# Altium PCB VoltageRegulator.PcbDoc
Units mil, origin at the board's own origin, x right, y up, seen from the top; angles counter-clockwise.
Board outline 2250 x 1100 mil, 2 copper layers (Top Layer, Bottom Layer); 9 components, 6 nets, 30 pads, 1 vias.
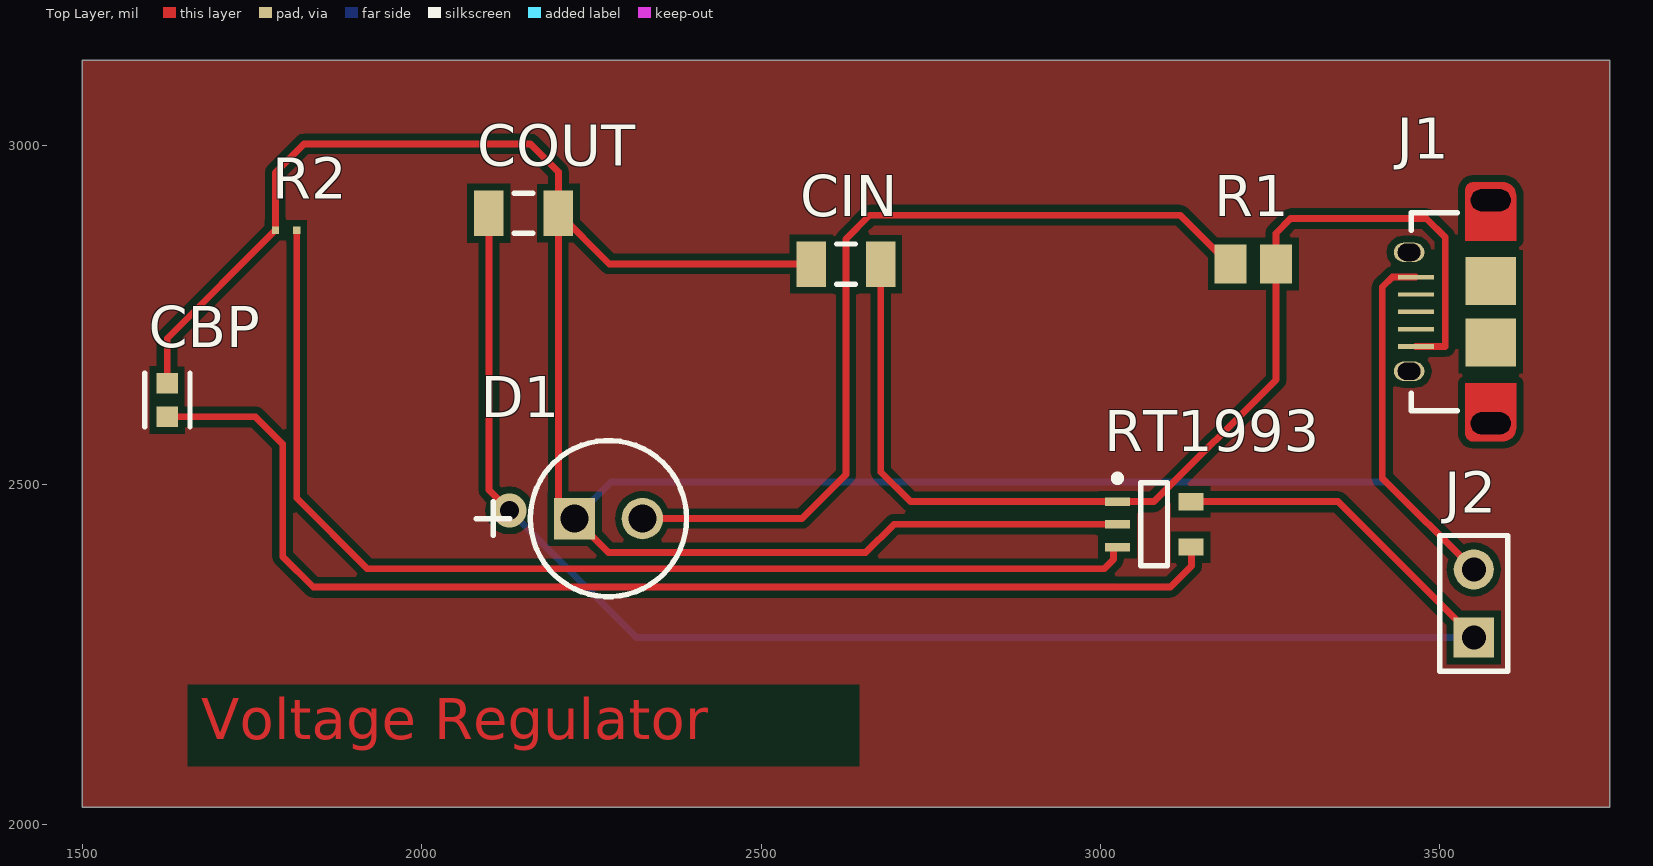
[diagram p0: Top Layer view]
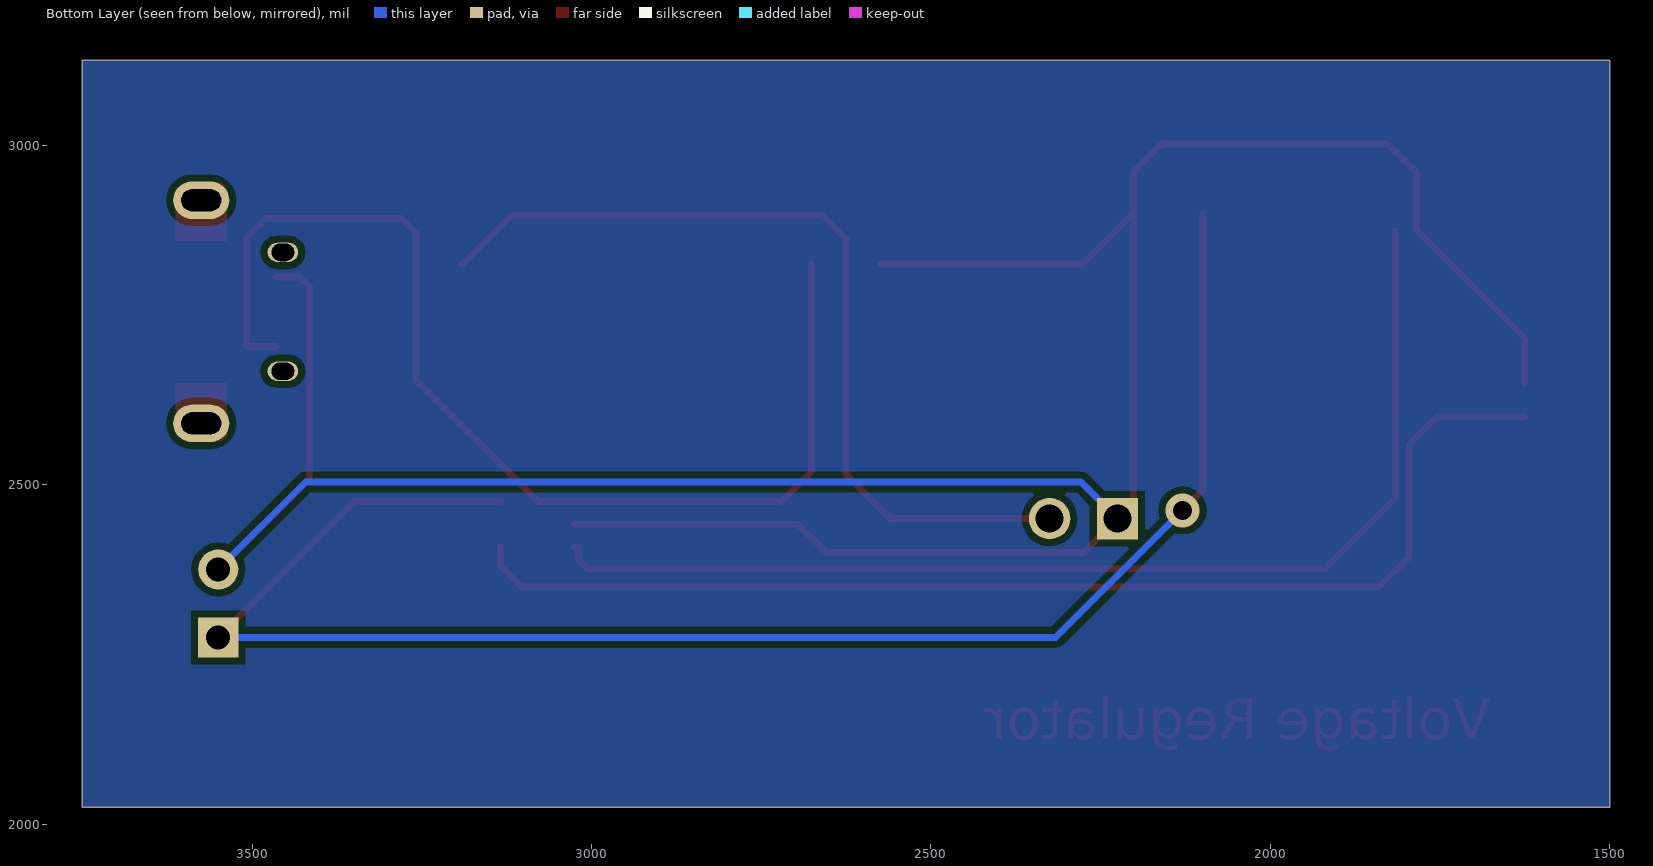
[diagram p1: Bottom Layer view, seen from below]

## Layer stack, top to bottom
Top Solder: solder mask 0.4, Solder Resist, Dk 3.5
Top Layer: signal copper 1.4
Dielectric 1: dielectric 12.6, FR-4, Dk 4.8
Bottom Layer: signal copper 1.4
Bottom Solder: solder mask 0.4, Solder Resist, Dk 3.5

## Board outline
1500,2025 3750,2025 3750,3125 1500,3125

## Design rules (kind name [scope] priority, off if disabled: settings)
Clearance [All] p1: gap=10 ignorepadtopadclearanceinfootprint=FALSE except(0: Arc-Hole Track-Hole SMDPad-Hole THPad-Hole Via-Hole Fill-Hole Poly-Hole Region-Hole Text-Hole)
PolygonConnect [All] p1: connectstyle=Relief reliefconductorwidth=10 reliefentries=4 polygonreliefangle="90 Angle" airgapwidth=10
RoutingVias [All] p1: holewidth=28 width=50 viastyle="Through Hole" minholewidth=28 minwidth=50 maxholewidth=28 maxwidth=50
SolderMaskExpansion [All] p1: expansion=4
Width [All] p1: maxlimit=10 minlimit=10 preferedwidth=10
30 further rules are at their usual default settings.

## Components (designator, comment, footprint, x,y, rotation, side; value= is the part's Value field where it differs from the comment)
CBP "CL10B223KB8NNNC" FP-CL10-IPC_C 1625,2624.68 r90 top
CIN "C1206C105K5RACTU" CAPC3216X110X50LL20T25 2625,2825 r0 top
COUT "C1206C105K5RACTU" CAPC3216X110X50LL20T25 2150,2900 r180 top
D1 "HLMP-3301" AVAG-HLMP-3301-2 2225,2450 r0 top
J1 "629105150921" 629105150921 3575,2754.72 r90 top
J2 "Header 2" HDR1X2 3550,2275 r90 top
R1 "ERA6AEB221V" RESC2013X60X40NL20T25 3225,2825 r0 top
R2 "CRCW0402100KJNED" RESC1005X40X25LL05T05 1800,2875 r0 top
RT1993 "3.3V" SOT85P279X130-5N 2944.13,2346.54 r0 top

## Footprints (in the part's own frame and the unit in brackets; to place one, negate y for a bottom-side part, rotate by r counter-clockwise, add the part's x,y. Pads: shape width x height; smd on the part's side, far side on the other; paste and mask are expansions set on the pad)
629105150921 [mm] "Micro USB 2.0 Type AB Horizontal"
  rect 0.171x1.35 smd: 1(-1.3,2.805) 2(-0.65,2.805) 3(0,2.805) 5(1.3,2.805)
  rect 0.146x1.35 smd: 4(0.65,2.805)
  round 0 / inner oval 1.4x2.1 / far side oval 1.4x2.1 hole 0.825 slot 1.5 at 90 deg: Shell(-4.175,0)
  oval 0.72x1.148 hole 0.65 slot 0.85 at 90 deg: Shell(-2.225,3.055) Shell(2.225,3.055)
  rect 1.8x1.9 smd: Shell(-1.15,0) Shell(1.15,0)
  round 0 / inner round 0 / far side oval 1.4x2.1 hole 0.825 slot 1.5 at 90 deg: Shell(4.175,0)
  Top Layer region: 4.353,-0.95 4.544,-0.912 4.706,-0.804 4.814,-0.641 4.852,-0.45 4.852,-0.45 4.852,0.65 4.83,0.765 4.765,0.862 4.667,0.927 4.553,0.95 4.553,0.95 2.668,0.95 2.668,-0.95
  Top Layer region: -4.353,-0.95 -4.544,-0.912 -4.706,-0.804 -4.814,-0.641 -4.852,-0.45 -4.852,-0.45 -4.852,0.65 -4.83,0.765 -4.765,0.862 -4.667,0.927 -4.553,0.95 -4.553,0.95 -2.668,0.95 -2.668,-0.95
  silkscreen extent -3.7,1.25 3.7,2.97, body extent -4.3,-2.64 4.3,3.23, height 2.76
AVAG-HLMP-3301-2 [mm] "THD, 2-Leads, Body Dia 5.85mm"
  rect 1.55x1.55 hole 1.05: 1(0,0)
  round 1.55 hole 1.05: 2(2.54,0)
  silkscreen extent -3.68,-2.92 4.19,2.92
CAPC3216X110X50LL20T25 [mm] "Chip Capacitor, 2-Leads, Body 3.20x1.60mm, IPC High Density"
  rect 1.1x1.7 smd: 1(-1.3,0) 2(1.3,0)
  silkscreen extent -0.35,-0.75 0.35,0.75, body extent -1.7,-0.9 1.7,0.9, height 1.1
FP-CL10-IPC_C [mil]
  rect 29.85x31.97 smd paste+0 mask+0: 1(-24.68,0) 2(24.69,0)
  silkscreen extent -40,-33 40,33, body extent -44,-22 44,22, height 10
HDR1X2 [mm] "Connector; Header; 2 Position"
  rect 1.5x1.5 hole 0.9: 1(0,0)
  round 1.5 hole 0.9: 2(2.54,0)
  silkscreen extent -1.27,-1.27 3.81,1.27
RESC1005X40X25LL05T05 [mm] "Chip Resistor, 2-Leads, Body 1.00x0.50mm, IPC High Density"
  rect 0.272x0.272 smd: 1(-0.4,0) 2(0.4,0)
  body extent -0.53,-0.27 0.53,0.28, height 0.4
RESC2013X60X40NL20T25 [mm] "Chip Resistor, 2-Leads, Body 2.00x1.25mm, IPC Medium Density"
  rect 1.2x1.45 smd: 1(-0.85,0) 2(0.85,0)
  body extent -1.1,-0.72 1.1,0.72, height 0.6
SOT85P279X130-5N [mm] "SOT23, 5-Leads, Body 2.90x2.79mm, Pitch 0.85mm, IPC Medium Density"
  rect 0.95x0.32 smd: 1(2.054,3.263) 2(2.054,2.413) 3(2.054,1.563)
  rect 0.95x0.65 smd: 4(4.804,1.563) 5(4.804,3.263)
  silkscreen extent 1.93,0.86 3.93,4.26, body extent 1.93,0.86 4.93,3.96, height 1.3

## Part data
CBP: library part CMP-13271-001437-1, "Cap Ceramic 22nF 50V X7R ±10% Pad SMD 0603 +125°C T/R", Capacitance=22nF, Case/Package=0603, Case Code (Metric)=1608, Dielectric=X7R, Max Operating Temperature=125°C, Min Operating Temperature=-55°C, Package Quantity=1, Tolerance=10%, Voltage=50V, Case Code (Imperial)=0603, Contact Plating=Tin, Depth=0.8mm, Height=0.8mm, Lead Free="Lead Free", Length=1.6mm, Material=Ceramic, Mount="Surface Mount", Packaging="Tape and Reel", Radiation Hardening=No, Thickness=0.035inch, Voltage Rating=50V, Voltage Rating (DC)=50V, Width=0.031inch
CIN COUT: library part CMP-2000-06011-1, "Chip Capacitor, 1 uF, +/- 10%, 50 V, -55 to 125 degC, 1206 (3216 Metric), RoHS, Tape and Reel", Capacitance=1uF, Capacitance - nF=1000nF, Case Code - in=1206, Case Code - mm=3216, Case Height=1mm, Case Length=3.2mm, Case Width=1.6mm, Dielectric=X7R, Manufacturer=Kemet, Maximum Operating Temperature=+125C, Minimum Operating Temperature=-55C, Operating Temperature Range=-55Cto+125C, Package / Case=1206(3216metric), Package Description="2-Pin Surface Mount Device, Body 3.2 x 1.6 mm", Temperature Coefficient / Code=+/-15%, Tolerance=10%, Voltage Rating=50V, =C1206C105K5RAC7800, Brand=Kemet, Class=Class1, Datasheet URL=http://www.kemet.com/docfinder?Partnumber=C1206C105K5RACTU, Datasheet Version=02/2016, Dimensions=1.6mmWx3.2mmLx1mmH, Factory Pack Quantity=2500, Manufacturer URL=http://www.kemet.com/, Mounting Technology=SurfaceMount, Package Reference=1206, Packaging=Reel, Product=GeneralTypeMLCCs, Product Category=MultilayerCeramicCapacitorsMLCC-SMD/SMT, RoHS=Details, Series=C1206C, Termination Style=SMD/SMT, Type=SMDMLCCX7R6.3-250VDCCommericalGrade, Voltage Rating DC=50V
D1: library part CMP-2000-06411-1, "T-1 3/4 (5 mm) Diffused LED Lamp, 1.9 V, -40 to 100 degC, 2-Pin THD, RoHS, Bulk", Emitting Color=Red, Forward Current=25mA, Forward Voltage=2.4V, Manufacturer=Avago, Operating Temperature Classification=Industrial, Operating Temp Range=-40Cto100C, Package Description="2-Pin Through Hole LED, Dia 5.85 mm", Package Type=T-13/4, Power Dissipation=85W, Reverse Voltage=5V, Test Current (It)=10mA, Chip Material=GaP, Datasheet URL=http://www.avagotech.com/docs/AV02-1558EN, Datasheet Version=03/2015, DELETED=Compliant, Dominant Wave Length=626nm, High Brightness=No, Lens Dimensions=5.08x5.08x8.3mm, Lens Type=ColoredDiffused, Luminous Intensity=5.4mcd, Lum Intensity=5.4mcd, Main Category=StandardLED, Manufacturer URL=http://www.avagotech.com/, Mounting=ThroughHole, Mounting Technology=ThroughHole, Number of  Elements=1, Package Reference=HLMP-3301, Packaging=TapeandReel, Peak Wavelength=635nm, Pin Count=2, Product Depth (mm)=6.1mm, Product Height (mm)=9.19mm, Product Length (mm)=6.1mm, Rad Hardened=No, Shape Type=Circular, Type=Uni-Color, Viewing Angle=60deg
J1: library part CMP-1502-03249-1, "Micro USB 2.0 Type AB Receptacle WR-COM, Horizontal, SMT", Contact Resistance=30mOhm, Manufacturer="Wurth Elektronik", Operating temperature=-40to85degC, Rated Current=1.8A, Working Voltage=30VAC, Connector Type=MicroUSB2.0TypeAB, Datasheet URL=https://katalog.we-online.de/em/datasheet/629105150921.pdf, Gender=Receptacle, Manufacturer URL=http://www.we-online.de, Mounting Technology=SMT, Orientation=Horizontal, Package Reference=629105150921, Packaging=TapeandReel, Part Number=629105150921, Publisher=WurthElektronik
J2: "Header, 2-Pin", LatestRevisionDate=17-Jul-2002, LatestRevisionNote="Re-released for DXP Platform.", Publisher="Altium Limited"
R1: library part CMP-2001-00612-1, Manufacturer=Panasonic, Part Number=ERA6AEB221V
R2: library part CMP-2002-08125-1, Manufacturer="Vishay Dale", Part Number=CRCW0402100KJNED
RT1993: library part KXEC-629051, "IC REG LINEAR 3.3V 300MA SOT23-5"

## Via types
v1: diameter 50, hole 28, Top Layer to Bottom Layer, 1 vias

## Nets (pads, with @x,y where several pads share a name; then routed paths per layer and width w, separated by ;. In a path a pad name is that pad's centre, name@x,y a point inside that pad or via, vN(x,y) a via of type N, cw(c..) or ccw(c..) an arc to the next point about the centre after c; other vN are vias at no path point)
GND: CBP.2 CIN.1 COUT.1 D1.1 J1.5 J2.2 R2.1 RT1993.2 | length 4518.7
  Top Layer w10: CBP.2 1625,2715.75 R2.1 1784.25,2960 1826.25,3002 2160,3002 2201.18,2960.82 COUT.1 ; CIN.1 2276.18,2825 COUT.1 ; RT1993.2 2695.54,2441.54 2654,2400 2275,2400 D1.1 2201.18,2473.82 COUT.1 ; J1.5 3430,2805.91 3415,2790.91 3415,2510 J2.2
  Bottom Layer w10: D1.1 2279,2504 3421,2504 J2.2
NetCBP_1: CBP.1 RT1993.4 | length 1751.9
  Top Layer w10: CBP.1 1755,2600 1795,2560 1795,2394 1840,2349 3103,2349 3134,2380 3134,2408.07 RT1993.4
NetCIN_2: CIN.2 J1.1 R1.2 RT1993.1 | length 1670.9
  Top Layer w10: CIN.2 2676.18,2518.82 2720,2475 RT1993.1 3079,2475 3258.46,2654.46 R1.2 3258.46,2870.46 3280,2892 3480,2892 3508,2864 3508,2703.54 J1.1
NetCOUT_2: COUT.2 J2.1 RT1993.5 | length 2448.5
  Top Layer w10: COUT.2 2098.82,2492.18 v1(2129,2462) ; RT1993.5 3350,2475 J2.1
  Bottom Layer w10: v1(2129,2462) 2316,2275 J2.1
NetD1_2: D1.2 R1.1 | length 1284.8
  Top Layer w10: D1.2 2560,2450 2625,2515 2625,2862 2660,2897 3117,2897 3189,2825 R1.1
NetR2_2: R2.2 RT1993.3 | length 1671.1
  Top Layer w10: R2.2 1815.75,2480.25 1920,2376 3005,2376 3019,2390 3019,2408.07 RT1993.3
pads on no net: J1.2 J1.3 J1.4 J1.Shell

## Polygon pours and split planes (outlines as drawn)
no net on Bottom Layer (solid, pour order 2): 1500,3125 3750,3125 3750,2025 1500,2025
no net on Bottom Layer (solid, pour order 0): 1500,3125
no net on Top Layer (solid, pour order 4): 1500,3125 3750,3125 3750,2025 1500,2025

## Other copper
Top Layer:
  text "Voltage Regulator" at 1675,2125 h60

## Silkscreen, mask and mechanical layers (free items; w line width, h text height)
Mechanical 1:
  lines w10: 1500,2025 3750,2025 3750,3125 1500,3125 1500,2950 1500,2025

## Text inside footprints (layer, text, board x,y; h text height)
J1: Mechanical 2 "PCB Edge" at 3653.74,2711.42 h16 r90